# Altium PCB Homework.PcbDoc
Units mil, origin at the board's own origin, x right, y up, seen from the top; angles counter-clockwise.
Board outline 1745 x 1130 mil, 2 copper layers (Top Layer, Bottom Layer); 13 components, 7 nets, 28 pads, 0 vias.
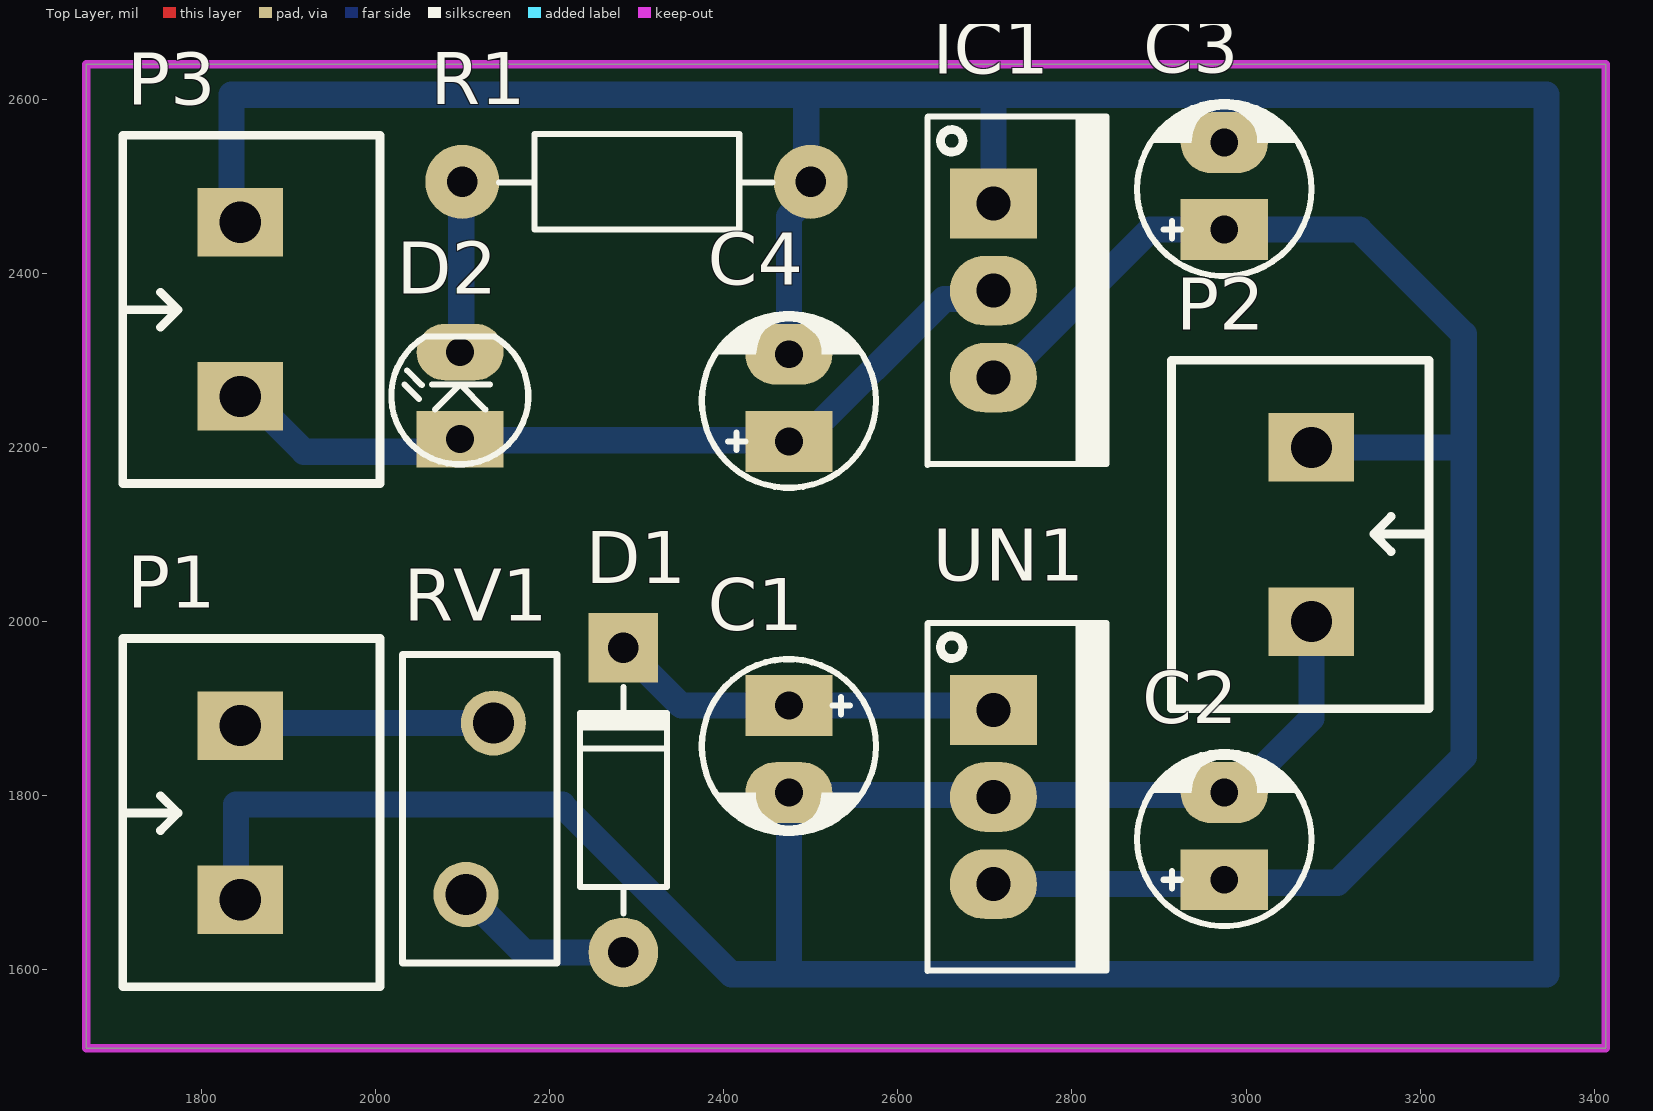
[diagram p0: Top Layer view]
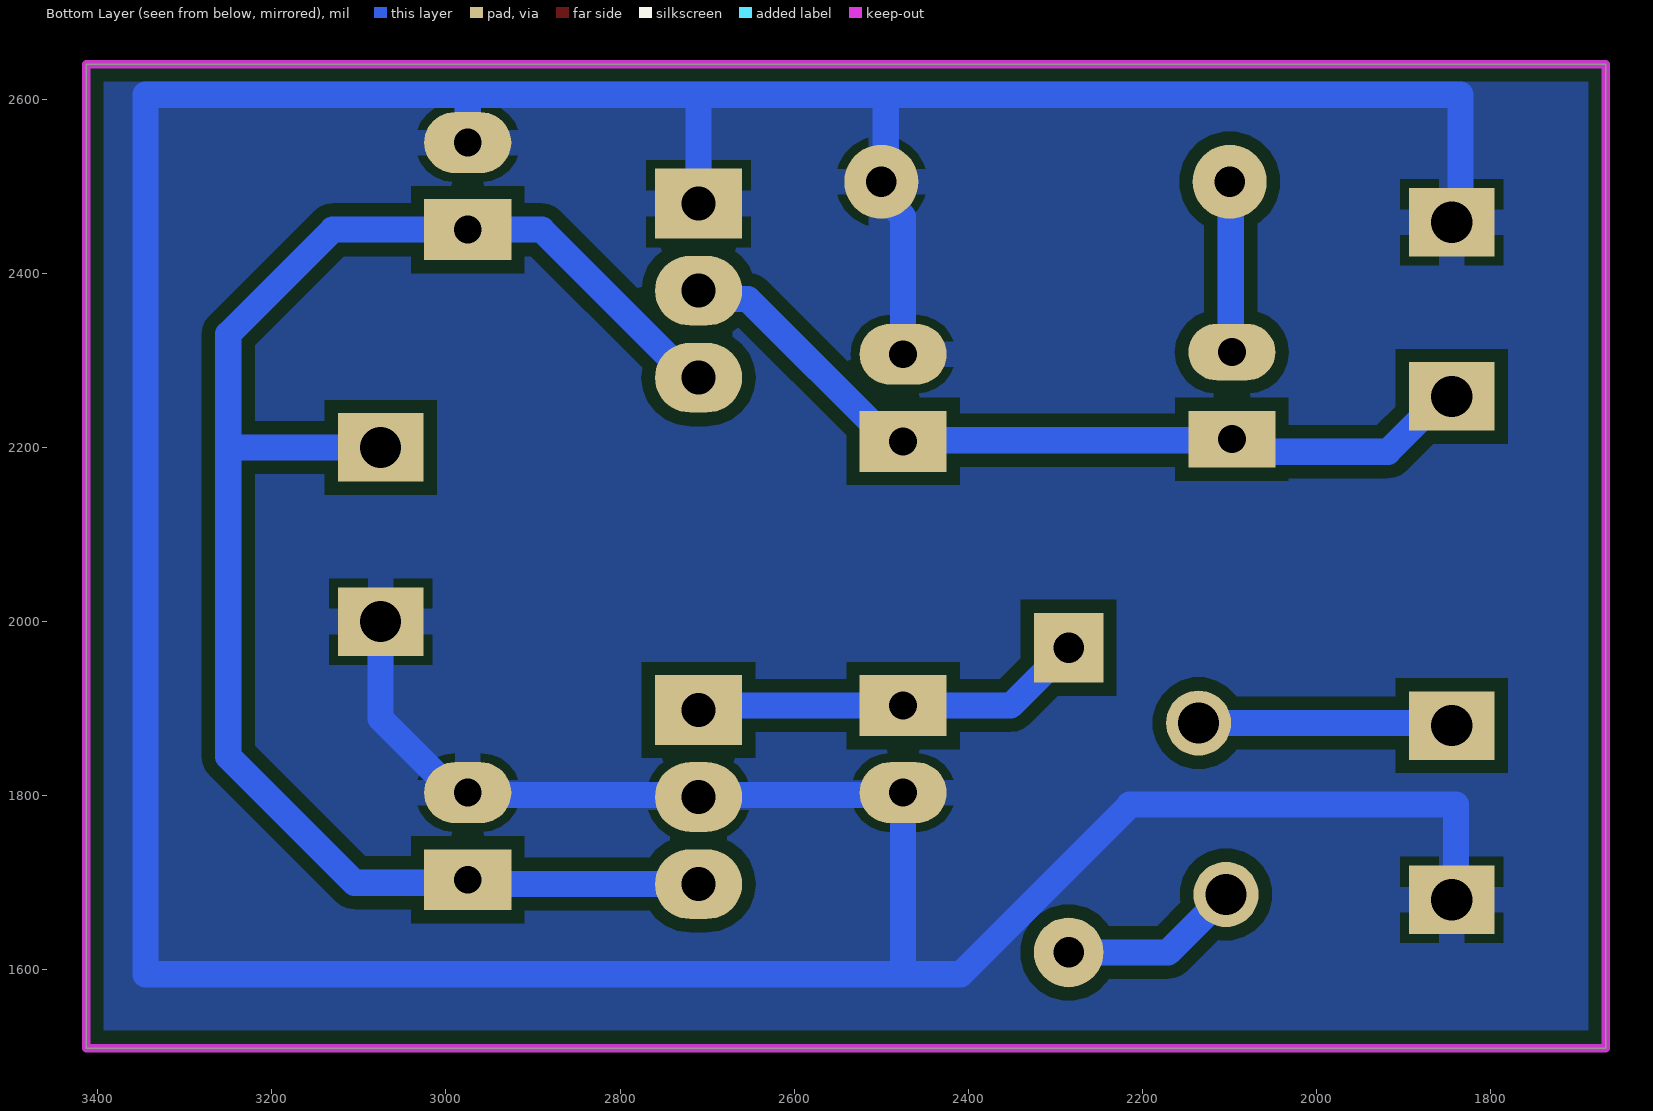
[diagram p1: Bottom Layer view, seen from below]
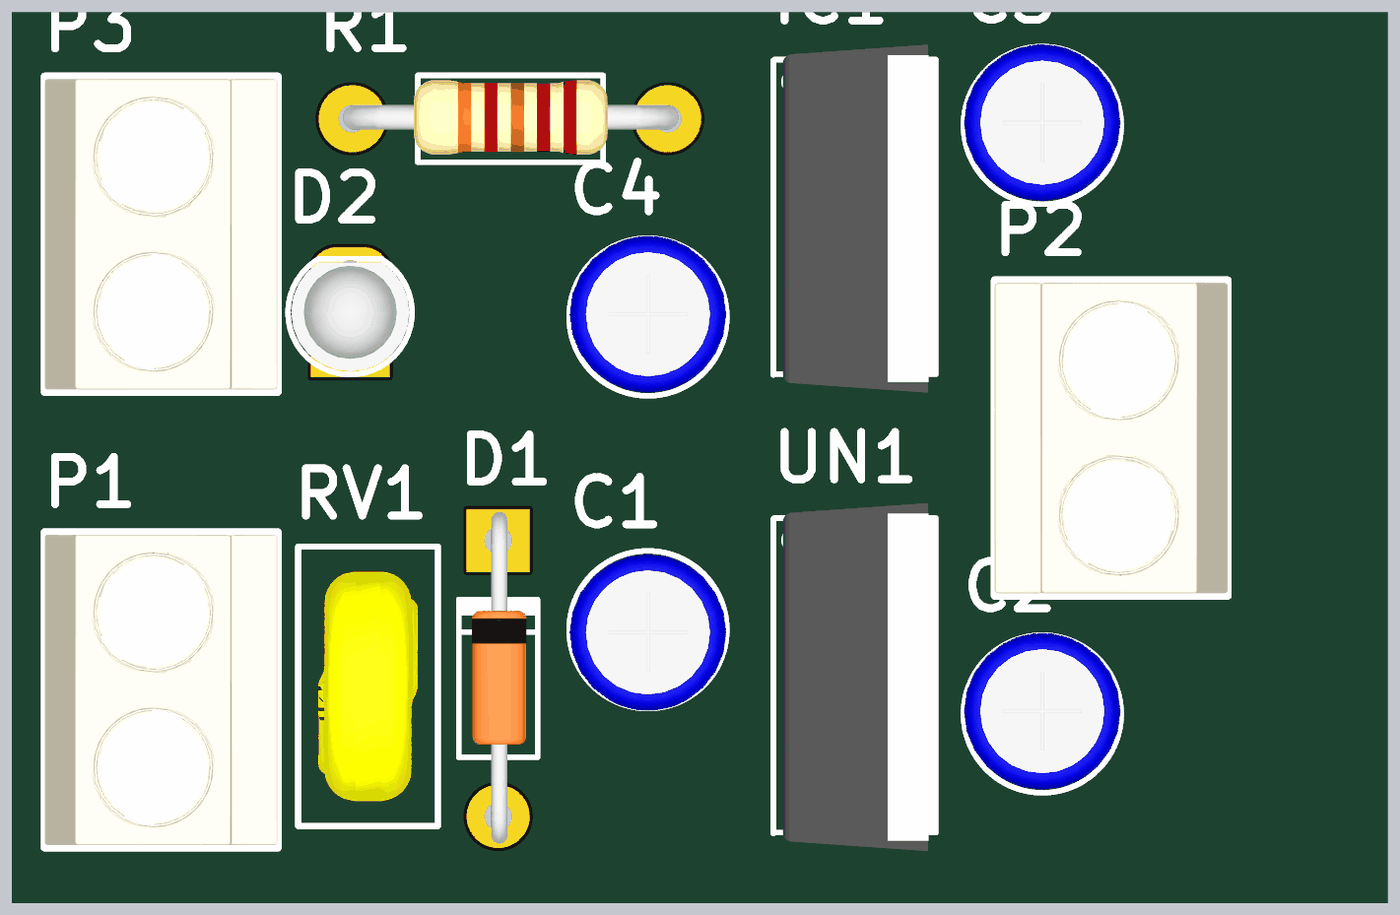
[diagram p2: 3D render of the assembled board from above, using the file's embedded part models]

## Layer stack, top to bottom
Top Solder: solder mask 0.4, Solder Resist, Dk 3.5
Top Layer: signal copper 1.4
Dielectric 1: dielectric 12.6, FR-4, Dk 4.8
Bottom Layer: signal copper 1.4
Bottom Solder: solder mask 0.4, Solder Resist, Dk 3.5

## Board outline
1668.12,1510 3413.12,1510 3413.12,2640 1668.12,2640

## Design rules (kind name [scope] priority, off if disabled: settings)
Clearance [All] p1: gap=15 ignorepadtopadclearanceinfootprint=FALSE
PlaneConnect [All] p1: planeconnectstyle=Relief reliefexpansion=20 reliefentries=4 reliefconductorwidth=30 reliefairgap=10
PolygonConnect [All] p1: connectstyle=Relief reliefconductorwidth=30 reliefentries=4 polygonreliefangle="90 Angle" airgapwidth=10
RoutingVias [All] p1: holewidth=31.5 width=59.06 viastyle="Through Hole" minholewidth=31.5 minwidth=59.06 maxholewidth=31.5 maxwidth=59.06
SolderMaskExpansion [All] p1: expansion=4 istentingtop=FALSE
Width [All] p1: maxlimit=50 minlimit=20 preferedwidth=30 minimp=50.000000 maximp=50.000000 favimp=50.000000
29 further rules are at their usual default settings.

## Components (designator, comment, footprint, x,y, rotation, side; value= is the part's Value field where it differs from the comment)
C1 "Cap Pol" CP1/2 2475,1903.46 r270 top value=10uF
C2 "Cap Pol" CP1/2 2975,1703.46 r90 top value=10uF
C3 "Cap Pol" CP1/2 2975,2450 r90 top value=10uF
C4 "Cap Pol" CP1/2 2475,2206.92 r90 top value=10uF
D1 "Diode" D1A 2285,1620 r270 top
D2 "LED" LED-3mm 2097.5,2209.42 r90 top
IC1 "LM1117" QTO-220 2710,2480 r270 top value=LM317
P1 "Domino 2" "DOMINO 2- 5mm" 1845,1780.55 r90 top
P2 "Domino 2" "DOMINO 2- 5mm" 3075,2100 r270 top
P3 "Domino 2" "DOMINO 2- 5mm" 1845,2358.5 r90 top
R1 "RESISTOR" "RES 1/2W" 2100,2505 r0 top value=1K
RV1 "14VAC, 18VDC" D9W4.5H12P0.8 2120,1785 r270 top
UN1 "LM7805" QTO-220 2710,1898.46 r270 top

## Footprints (in the part's own frame and the unit in brackets; to place one, negate y for a bottom-side part, rotate by r counter-clockwise, add the part's x,y. Pads: shape width x height; smd on the part's side, far side on the other; paste and mask are expansions set on the pad)
CP1/2 [mil] "Tu hoa < 22uF/16>50V"
  rect 70x100 hole 32: 1(0,0)
  oval 70x100 hole 32: 2(100,0)
  silkscreen extent -53,-100 146,100, body extent -49,-99 149,99, height 287
D1A [mil] "Diode 1N4007, W 100mil, L 350mil"
  round 80 hole 35: 1(0,0)
  rect 80x80 hole 35: 2(-350,0)
  silkscreen extent -305,-50 -45,50, body extent -386,-33 34,36, height 84
D9W4.5H12P0.8 [mm] "Disk Varistor, Diameter 9mm, Width 4.5mm"
  round 1.9 hole 1.2: 1(-2.5,0.4) 2(2.5,-0.4)
  silkscreen extent -4.5,-2.25 4.5,2.25, body extent -3.7,-1.6 3.7,1.6, height 9.7
"DOMINO 2- 5mm" [mm]
  rect 2x2.5 hole 1.2: 1(-2.54,0) 2(2.54,0)
  silkscreen extent -5.08,-4.08 5.08,3.43, body extent -5,-4.07 5,3.43, height 10
LED-3mm [mil] "LED 2 PIN, 3ly Only colour"
  rect 65x100 hole 32: 1(0,0)
  oval 65x100 hole 32: 2(100,0)
  silkscreen extent -29,-78 118,79, body extent -25,-75 113,75, height 217
QTO-220 [mil] "TO-220 - 1-2-3"
  rect 80x100 hole 39: 1(0,0)
  oval 80x100 hole 39: 2(100,0) 3(200,0)
  silkscreen extent -100,-76 300,130, body extent -119,-64 322,121, height 755
"RES 1/2W" [mil] "R 1/2W, 2 pin, 300mil"
  round 85 hole 35: 1(0,0) 2(400,0)
  silkscreen extent 42,-55 356,55, body extent -12,-45 414,49, height 91

## Part data
C1 C2 C3 C4: "Polarized Capacitor (Radial)"
D1: "Default Diode"
IC1: "Available in 1.8V, 2.5V, 2.85V, 3.3V, 5V, and  Adjustable Versions"
P1 P2 P3: "Domino, 2-Pin", LatestRevisionDate=17-Jul-2002, LatestRevisionNote="Re-released for DXP Platform.", Publisher="Altium Limited"
R1: "Resistor"
RV1: library part 820571406, "WE-VD Disk Varistor, THT, 14VAC, 18VDC, 2930pF", (Reverse) Breakdown Voltage=22V, (Reverse) Peak Pulse Current=250A, Channel Input Capacitance=2930pF, Clamping Voltage=43V, Manufacturer="Wurth Elektronik", Operating Temperature Max=85°C, Operating Temperature Min=-40°C, Operating Voltage (AC)=14V, Operating Voltage (DC)=18V, Power Dissipation=0.02W, Category="Surge Protection", ComponentLink1Description="Website Link", ComponentLink1URL=https://www.we-online.com/redexpert/article/820571406?ad, ComponentLink2Description="Datasheet Link", ComponentLink2URL=https://www.we-online.com/redexpert/spec/820571406?ad, Diameter=9mm, Energy Absorption=1.4J, Height=12mm, Manufacturer Part Number=820571406, Match Code=WE-VD, Mount="Through Hole", Packaging="Tape and Reel", Pitch=0.8mm, Width=4.5mm
UN1: "Positive Voltage Regulator"

## Nets (pads, with @x,y where several pads share a name; then routed paths per layer and width w, separated by ;. In a path a pad name is that pad's centre, name@x,y a point inside that pad or via, vN(x,y) a via of type N, cw(c..) or ccw(c..) an arc to the next point about the centre after c; other vN are vias at no path point)
+3V3: C4.1 D2.1 IC1.2 P3.1 | length 980
  Bottom Layer w30: P3.1 1854.84,2258.5 1918.34,2195 2083.08,2195 D2.1 2098.75,2208.17 2473.75,2208.17 C4.1 2490,2206.92 2653.52,2370.43 2700.43,2370.43 IC1.2 IC1.2@2700,2380
+5: C2.1 C3.1 IC1.3 P2.1 UN1.3 | length 1923.7
  Bottom Layer w30: UN1.3 2970,1698.46 C2.1 2978.46,1700 3105,1700 3250,1845 3250,2200 ; IC1.3 2720,2280 2890,2450 C3.1 3130,2450 3250,2330 3250,2200 ; P2.1 3250,2200
+12: C1.1 D1.2 UN1.1 | length 454.6
  Bottom Layer w30: D1.2 2351.54,1903.46 2500,1903.46 2705,1903.46 UN1.1
GND: C1.2 C2.2 C3.2 C4.2 IC1.1 P1.1 P2.2 P3.2 R1.2 UN1.2 | length 5824.2
  Bottom Layer w30: P1.1 1840,1680.55 1840,1790 2215,1790 2215,1788.99 2408.99,1595 2475,1595 ; P3.2 1835,2468.5 1835,2605 2495,2605 ; C4.2 2475,2465.12 2500,2490.12 R1.2 2495,2505 2495,2605 ; IC1.1 2710,2605 ; C3.2 2975,2605 ; P2.2 3075,1888.46 2990,1803.46 C2.2 2972.5,1800.96 2712.5,1800.96 UN1.2 2707.5,1800.96 2477.5,1800.96 C1.2 2475,1595 ; 2475,1595 3345,1595 3345,2605 2975,2605 ; 2495,2605 2710,2605 ; 2710,2605 2975,2605
NetD1_1: D1.1 RV1.2 | length 208.3
  Bottom Layer w30: RV1.2 2170.83,1620 D1.1
NetD2_2: D2.2 R1.1 | length 196.6
  Bottom Layer w30: D2.2 2098.75,2310.67 2098.75,2503.75 R1.1
NetP1_2: P1.2 RV1.1 | length 291.9
  Bottom Layer w30: P1.2 1847.87,1883.43 RV1.1

## Polygon pours and split planes (outlines as drawn)
GND on Bottom Layer "GND_L02_P002" (solid, remove dead copper, pour order 2): 1668.12,1510 3413.12,1510 3413.12,2640 1668.12,2640

## Keep-outs
Keep-Out Layer:
  lines w10: 1668.12,2640 1668.12,1510 3413.12,1510 3413.12,1585 3413.12,2640 1670,2640